# Altium PCB Controller.PcbDoc
Units mm, origin at the board's own origin, x right, y up, seen from the top; angles counter-clockwise.
Board outline 152.4 x 101.6 mm, 2 copper layers (Top Layer, Bottom Layer); 21 components, 29 nets, 164 pads, 0 vias.
Unrouted connection lines stored in the file: 50.
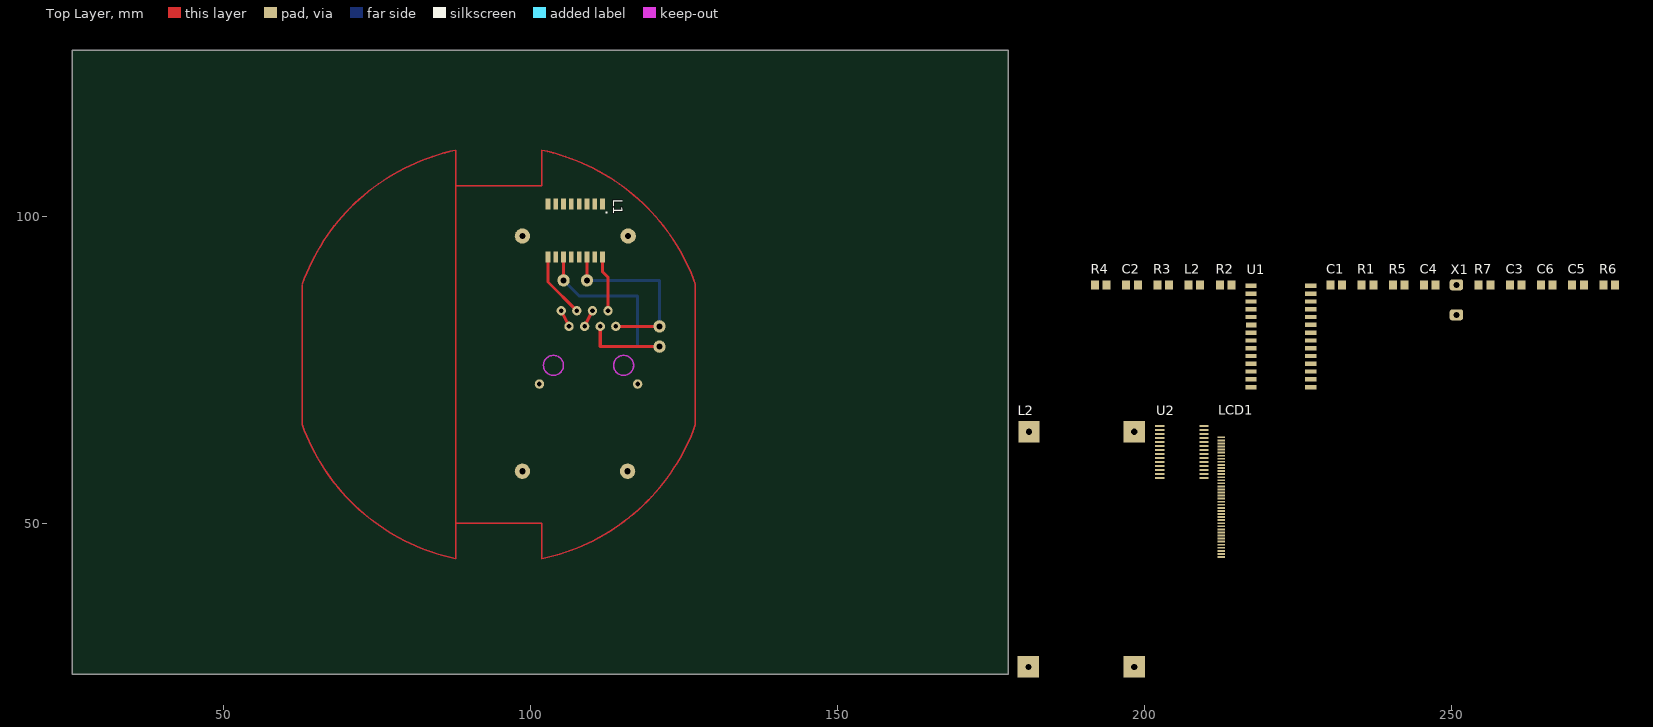
[diagram p0: Top Layer view]
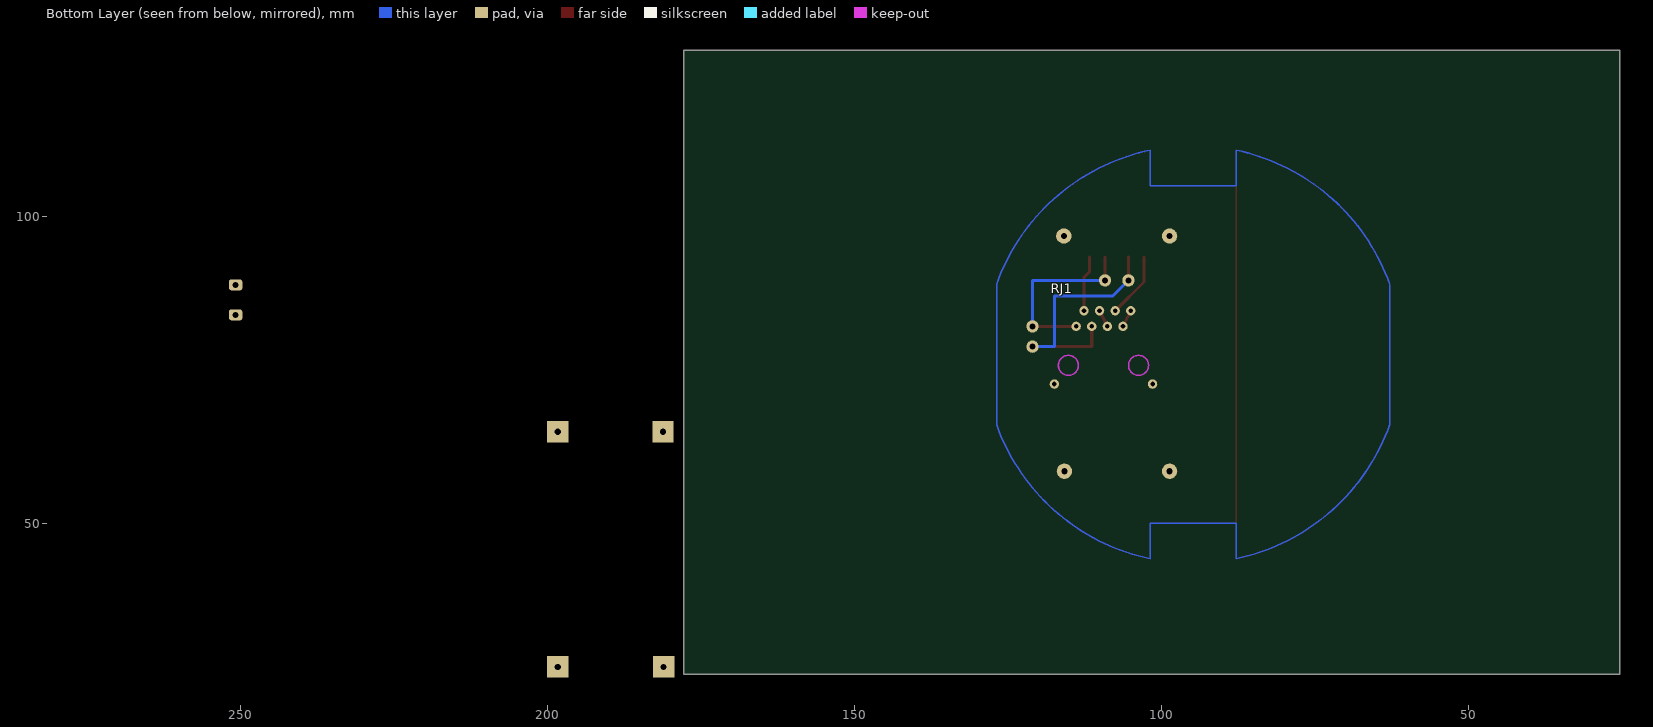
[diagram p1: Bottom Layer view, seen from below]

## Layer stack, top to bottom
Top Layer: signal copper 0.0356
Dielectric: dielectric 0.32, FR-4, Dk 4.8
Bottom Layer: signal copper 0.0356

## Board outline
25.4,25.4 177.8,25.4 177.8,127 25.4,127

## Design rules (kind name [scope] priority, off if disabled: settings)
Clearance [All] p1: gap=0.254
PolygonConnect [All] p1: connectstyle=Relief reliefconductorwidth=0.254 reliefentries=4 polygonreliefangle="90 Angle" airgapwidth=0.254
RoomDefinition E1 [InComponentClass('E1')] p1: confinementstyle=ConfineIn formatcopy=TRUE lockcomponents=FALSE outline 178.943,24.384 277.749,24.384 277.749,92.583 178.943,92.583
RoomDefinition Controller [InComponentClass('Controller')] p2: confinementstyle=ConfineIn formatcopy=TRUE lockcomponents=FALSE outline 178.943,24.384 228.346,24.384 228.346,92.583 178.943,92.583
RoutingVias [All] p1: holewidth=0.711 width=1.27 viastyle="Through Hole" minholewidth=0.711 minwidth=1.27 maxholewidth=0.711 maxwidth=1.27
SilkscreenOverComponentPads [All] p1: minsilkscreentomaskgap=0.254
SolderMaskExpansion [All] p1: expansion=0.102
Width [All] p1: maxlimit=0.254 minlimit=0.254 preferedwidth=0.254
27 further rules are at their usual default settings.

## Classes and differential pairs
component class E1: C1 C2 C3 C4 C5 C6 L2 R1 R2 R3 R4 R5 R6 R7 RJ1 U2 X1
component class Controller: L2 LCD1 U2

## Components (designator, comment, footprint, x,y, rotation, side; value= is the part's Value field where it differs from the comment)
C1 "100nF" SMD-0805 231.267,88.773 r0 top
C2 "100nF" SMD-0805 197.993,88.773 r0 top
C3 "12pF" SMD-0805 260.477,88.773 r0 top
C4 "12pF" SMD-0805 246.507,88.773 r0 top
C5 "10uF" SMD-0805 270.637,88.773 r0 top
C6 "10uF" SMD-0805 265.557,88.773 r0 top
L1 "PULSE H1102FNL" H1102FNL 107.315,97.663 r270 top
L2 "FB 200mA" SMD-0805 208.153,88.773 r0 top
L2 "LM2596" LM2596 189.738,45.72 r90 top
LCD1 "LCD - 240320J1" F0500WR-S-40PT 214.884,54.229 r90 top
R1 "510" SMD-0805 236.347,88.773 r0 top
R2 "510" SMD-0805 213.233,88.773 r0 top
R3 "510" SMD-0805 203.073,88.773 r0 top
R4 "510" SMD-0805 192.913,88.773 r0 top
R5 "20K" SMD-0805 241.427,88.773 r0 top
R6 "1K" SMD-0805 275.717,88.773 r0 top
R7 "1K" SMD-0805 255.397,88.773 r0 top
RJ1 "RJ45GE" RJ45GE 109.474,84.582 r180 bottom locked
U1 "ENC28J60-I/SO" SO-28 222.25,80.391 r0 top
U2 "PIC18F26K22" SSOP-28 206.121,61.595 r0 top
X1 "25MHz" THT2-488 250.825,86.36 r90 top

## Footprints (in the part's own frame and the unit in brackets; to place one, negate y for a bottom-side part, rotate by r counter-clockwise, add the part's x,y. Pads: shape width x height; smd on the part's side, far side on the other; paste and mask are expansions set on the pad)
F0500WR-S-40PT [mm] "Conector: FFC (FPC); PIN:40; ZIF, orizontale, contacte superioare"
  rect 0.3x1.25 smd mask+0.08: 1(-9.75,2.375) 2(-9.25,2.375) 3(-8.75,2.375) 4(-8.25,2.375) 5(-7.75,2.375) 6(-7.25,2.375) 7(-6.75,2.375) 8(-6.25,2.375) 9(-5.75,2.375) 10(-5.25,2.375) 11(-4.75,2.375) 12(-4.25,2.375) 13(-3.75,2.375) 14(-3.25,2.375) 15(-2.75,2.375) 16(-2.25,2.375) 17(-1.75,2.375) 18(-1.25,2.375) 19(-0.75,2.375) 20(-0.25,2.375) 21(0.25,2.375) 22(0.75,2.375) 23(1.25,2.375) 24(1.75,2.375) 25(2.25,2.375) 26(2.75,2.375) 27(3.25,2.375) 28(3.75,2.375) 29(4.25,2.375) 30(4.75,2.375) 31(5.25,2.375) 32(5.75,2.375) 33(6.25,2.375) 34(6.75,2.375) 35(7.25,2.375) 36(7.75,2.375) 37(8.25,2.375) 38(8.75,2.375) 39(9.25,2.375) 40(9.75,2.375)
H1102FNL [mm] "Transformer: Ethernet; SMD; Trans: RX 1:1,TX 1:1; -1.1dB; 0÷70°C"
  rect 1.8x0.76 smd: 4(-4.33,0.635) 5(-4.33,-0.635) 10(4.33,-3.175) 12(4.33,-0.635) 13(4.33,0.635) 15(4.33,3.175) CT_RD(-4.33,-3.175) CT_TD(-4.33,3.175) RD+(-4.33,-1.905) RD-(-4.33,-4.445) RX+(4.33,-1.905) RX-(4.33,-4.445) TD+(-4.33,4.445) TD-(-4.33,1.905) TX+(4.33,4.445) TX-(4.33,1.905)
  silkscreen extent -2.98,5.02 -2.86,5.14
LM2596 [mm] "Modul DC-DC Step Down LM2596"
  rect 3.5x3.5 hole 1: 1(-19.152,8.611) 2(-19.152,-8.611) 3(19.152,-8.611) 4(19.152,8.525)
  Mechanical 1 keep-out circle w0.254: c14.5,-7.889 r1.5
  Mechanical 1 keep-out circle w0.254: c-14.5,8 r1.5
RJ45GE [mil] "Soclu; RJ45; PIN:8; ecranat; Dispunere pini:8p8c; THT"
  round 60 hole 30: 1(-175,-100) 2(-125,0) 3(-75,-100) 4(-25,0) 5(25,-100) 6(75,0) 7(125,-100) 8(175,0) GND-1(-314.96,-470.08) GND-2(314.96,-470.08)
  Multi-Layer keep-out circle w10: c-225,-350 r63.98
  Multi-Layer keep-out circle w10: c225,-350 r63.98
SMD-0805 [mm]
  rect 1.3x1.5 smd: 1(-0.95,0) 2(0.95,0)
  body extent -1,-0.62 1,0.63, height 0.78
SO-28 [mm]
  rect 1.8x0.7 smd: 1(-4.85,8.255) 2(-4.85,6.985) 3(-4.85,5.715) 4(-4.85,4.445) 5(-4.85,3.175) 7(-4.85,0.635) 8(-4.85,-0.635) 9(-4.85,-1.905) 10(-4.85,-3.175) 11(-4.85,-4.445) 12(-4.85,-5.715) 13(-4.85,-6.985) 14(-4.85,-8.255) 15(4.85,-8.255) 16(4.85,-6.985) 17(4.85,-5.715) 18(4.85,-4.445) 19(4.85,-3.175) 20(4.85,-1.905) 21(4.85,-0.635) 22(4.85,0.635) 23(4.85,1.905) 24(4.85,3.175) 25(4.85,4.445) 26(4.85,5.715) 27(4.85,6.985) 28(4.85,8.255)
  rect 1.7x0.8 smd: 6(-4.85,1.905)
  body extent -4.44,-9.4 4.44,9.4, height 4.7
SSOP-28 [mm]
  rect 1.5x0.35 smd: 1(-3.6,4.225) 2(-3.6,3.575) 3(-3.6,2.925) 4(-3.6,2.275) 5(-3.6,1.625) 6(-3.6,0.975) 7(-3.6,0.325) 8(-3.6,-0.325) 9(-3.6,-0.975) 10(-3.6,-1.625) 11(-3.6,-2.275) 12(-3.6,-2.925) 13(-3.6,-3.575) 14(-3.6,-4.225) 15(3.6,-4.225) 16(3.6,-3.575) 17(3.6,-2.925) 18(3.6,-2.275) 19(3.6,-1.625) 20(3.6,-0.975) 21(3.6,-0.325) 22(3.6,0.325) 23(3.6,0.975) 24(3.6,1.625) 25(3.6,2.275) 26(3.6,2.925) 27(3.6,3.575) 28(3.6,4.225)
  body extent -4.1,-5.25 4.13,5.25, height 1.95
THT2-488 [mm] "THT, 2 slot, 4.88mm"
  rrect50% 1.8x2.2 hole 1: 1(-2.44,0) 2(2.44,0)

## Part data
C1 C2: library part C-100nF-0805, "Condensator: ceramic; 100nF; 50V; X7R; ±10%; SMD; 0805; -55÷125°C"
C3 C4: library part C-12pF-0805, "Condensator: ceramic; MLCC; 12pF; 50V; C0G; ±5%; SMD; 0805"
C5 C6: library part C-10uF-0805, "Condensator: ceramic; 10uF; 16V; X5R; ±10%; SMD; 0805; -55÷125°C"
L1: "Transformer: Ethernet; SMD; Trans: RX 1:1,TX 1:1; -1.1dB; 0÷70°C"
L2: "Ferrite: bead; 150ohm; Mounting: SMD; 200mA; Case:0805; -55÷125°C"
L2: "Modul DC-DC Step Down LM2596 Albastru Intrare 3 - 35 V SMD"
LCD1: "TFT; 2,4\"; 240x320; Ilum: LED; Dim:42,72x60,26x3,9mm"
R1 R2 R3 R4: library part R-510-0805, "Rezistor: thick film; SMD; 0805; 510O; 125mW; ±1%; -55÷155°C"
R5: library part R-2.2K-0805, "Rezistor: thick film; SMD; 0805; 2,2kO; 0,125W; ±1%; -55÷155°C"
R6 R7: library part R-1K-0805, "Rezistor: thick film; SMD; 0805; 1kO; 0,125W; ±5%; -55÷155°C"
RJ1: "Soclu; RJ45; PIN:8; ecranat; Dispunere pini:8p8c; THT"
U1: "Controler Ethernet; 10Base-T; SPI; SO28; 3,1÷3,6V"
U2: "Microcontroler PIC; EEPROM:1024B; SRAM:3896B; 64MHz; SSOP28"
X1: library part "YIC 25.00M-HC49-S", "Rezonator: de cuart; 25MHz; THT"

## Free pads (board coordinates)
  round 2.5 hole 1: 2(98.704,58.445) 2(98.704,96.749) 2(115.84,58.445) 2(115.926,96.749)
  round 2 hole 1: 3(105.41,89.535) 3(109.22,89.535) 3(121.031,78.74) 3(121.031,82.042)

## Nets (pads, with @x,y where several pads share a name; then routed paths per layer and width w, separated by ;. In a path a pad name is that pad's centre, name@x,y a point inside that pad or via, vN(x,y) a via of type N, cw(c..) or ccw(c..) an arc to the next point about the centre after c; other vN are vias at no path point)
GND: C1.2 C2.2 C3.1 C4.1 C5.1 C6.1 L2.3 pad.2@98.704,58.445 R5.2 U1.2 U1.11 U1.18 U1.21 U1.22 U2.8 U2.19
NetC1_1: C1.1 L1.CT_TD L2.2@209.103,88.773 R1.2 R2.1
NetC2_1: C2.1 L1.CT_RD R3.2 R4.1
NetC3_2: C3.2 U1.24 X1.1
NetC4_2: C4.2 U1.23 X1.2
NetC5_2: C5.2 U1.1
NetC6_2: C6.2 L2.1@207.203,88.773 U1.15 U1.19 U1.20 U1.25 U1.28
NetL1_RD+: L1.RD+ R3.1 U1.13
NetL1_RD-: L1.RD- R4.2 U1.12
NetL1_RX+: L1.RX+ pad.3@105.41,89.535 pad.3@121.031,78.74 RJ1.3 | length 41.7
  Top Layer w0.5: pad.3@105.41,89.535 L1.RX+ ; RJ1.3 111.379,78.74 pad.3@121.031,78.74
  Bottom Layer w0.5: pad.3@105.41,89.535 107.95,86.995 117.475,86.995 117.475,78.74 pad.3@121.031,78.74
NetL1_RX-: L1.RX- RJ1.6 | length 10.7
  Top Layer w0.5: L1.RX- 102.87,89.281 RJ1.6
NetL1_TD+: L1.TD+ R1.1 U1.17
NetL1_TD-: L1.TD- R2.2 U1.16
NetL1_TX+: L1.TX+ RJ1.2 | length 9.1
  Top Layer w0.5: L1.TX+ 111.76,90.932 112.649,90.043 RJ1.2
NetL1_TX-: L1.TX- pad.3@109.22,89.535 pad.3@121.031,82.042 RJ1.1 | length 30.2
  Top Layer w0.5: pad.3@109.22,89.535 L1.TX- ; RJ1.1 pad.3@121.031,82.042
  Bottom Layer w0.5: pad.3@109.22,89.535 121.031,89.535 pad.3@121.031,82.042
NetR5_1: R5.1 U1.14
NetR6_1: R6.1
NetR6_2: R6.2 U1.27
NetR7_1: R7.1
NetR7_2: R7.2 U1.26
NetRJ1_GND-1: RJ1.GND-1 RJ1.GND-2
NetU1_6: U1.6
NetU1_7: U1.7
NetU1_8: U1.8
NetU1_9: U1.9
NetU1_10: U1.10
"V +5V": L2.4 pad.2@115.84,58.445
"VCC +": L2.1@181.127,26.568 pad.2@115.926,96.749 RJ1.4 RJ1.5 | length 2.8
  Top Layer w0.5: RJ1.5 RJ1.4
"VCC -": L2.2@198.349,26.568 pad.2@98.704,96.749 RJ1.7 RJ1.8 | length 2.8
  Top Layer w0.5: RJ1.8 RJ1.7
pads on no net: L1.4 L1.5 L1.10 L1.12 L1.13 L1.15 LCD1.1 LCD1.2 LCD1.3 LCD1.4 LCD1.5 LCD1.6 LCD1.7 LCD1.8 LCD1.9 LCD1.10 LCD1.11 LCD1.12 LCD1.13 LCD1.14 LCD1.15 LCD1.16 LCD1.17 LCD1.18 LCD1.19 LCD1.20 LCD1.21 LCD1.22 LCD1.23 LCD1.24 LCD1.25 LCD1.26 LCD1.27 LCD1.28 LCD1.29 LCD1.30 LCD1.31 LCD1.32 LCD1.33 LCD1.34 LCD1.35 LCD1.36 LCD1.37 LCD1.38 LCD1.39 LCD1.40 U1.3 U1.4 U1.5 U2.1 U2.2 U2.3 U2.4 U2.5 U2.6 U2.7 U2.9 U2.10 U2.11 U2.12 U2.13 U2.14 U2.15 U2.16 U2.17 U2.18 U2.20 U2.21 U2.22 U2.23 U2.24 U2.25 U2.26 U2.27 U2.28
copper on no net: | length 55
  Top Layer w0.254: 87.869,49.97 87.869,104.97

## Other copper
Multi-Layer:
  lines w0.254: 62.848,66.033 ccw(c94.869,77.47) 87.869,44.196 87.869,49.97 94.869,49.97 101.869,49.97 101.869,44.196 ccw(c94.869,77.47) 126.89,66.033 ; 62.848,88.907 cw(c94.869,77.47) 87.869,110.744 87.869,104.97 94.869,104.97 101.869,104.97 101.869,110.744 cw(c94.869,77.47) 126.89,88.907 ; 62.869,65.913 62.869,77.343 62.869,88.773 ; 126.869,66.04 126.869,77.47 126.869,88.9